# EAGLE board ds-8_clone_v2.0 (EAGLE 5.10)
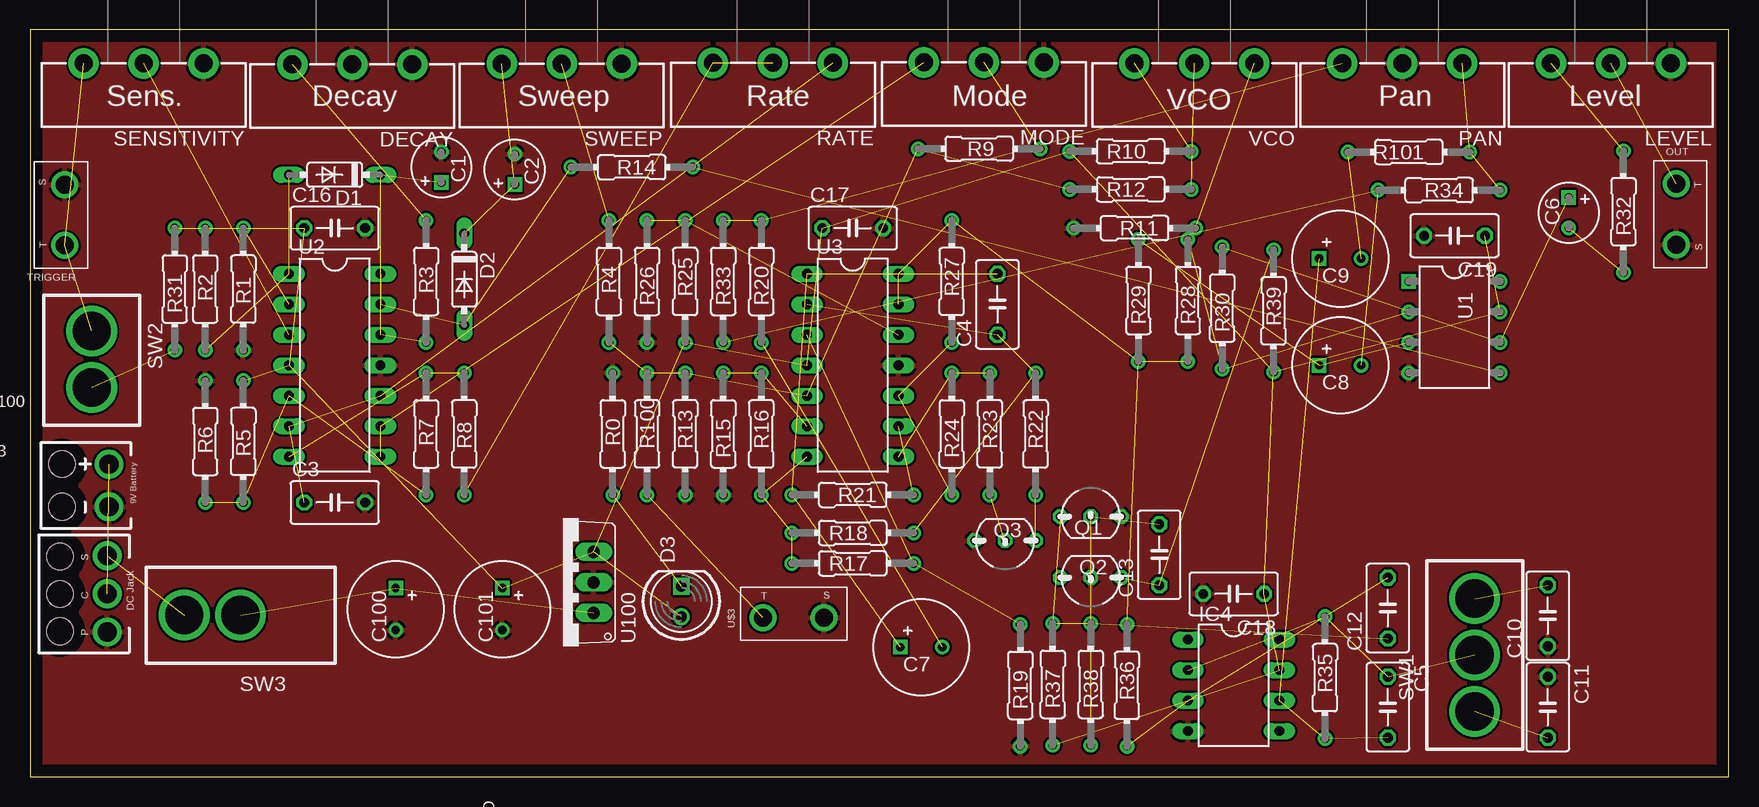
[diagram p0: board, top side]
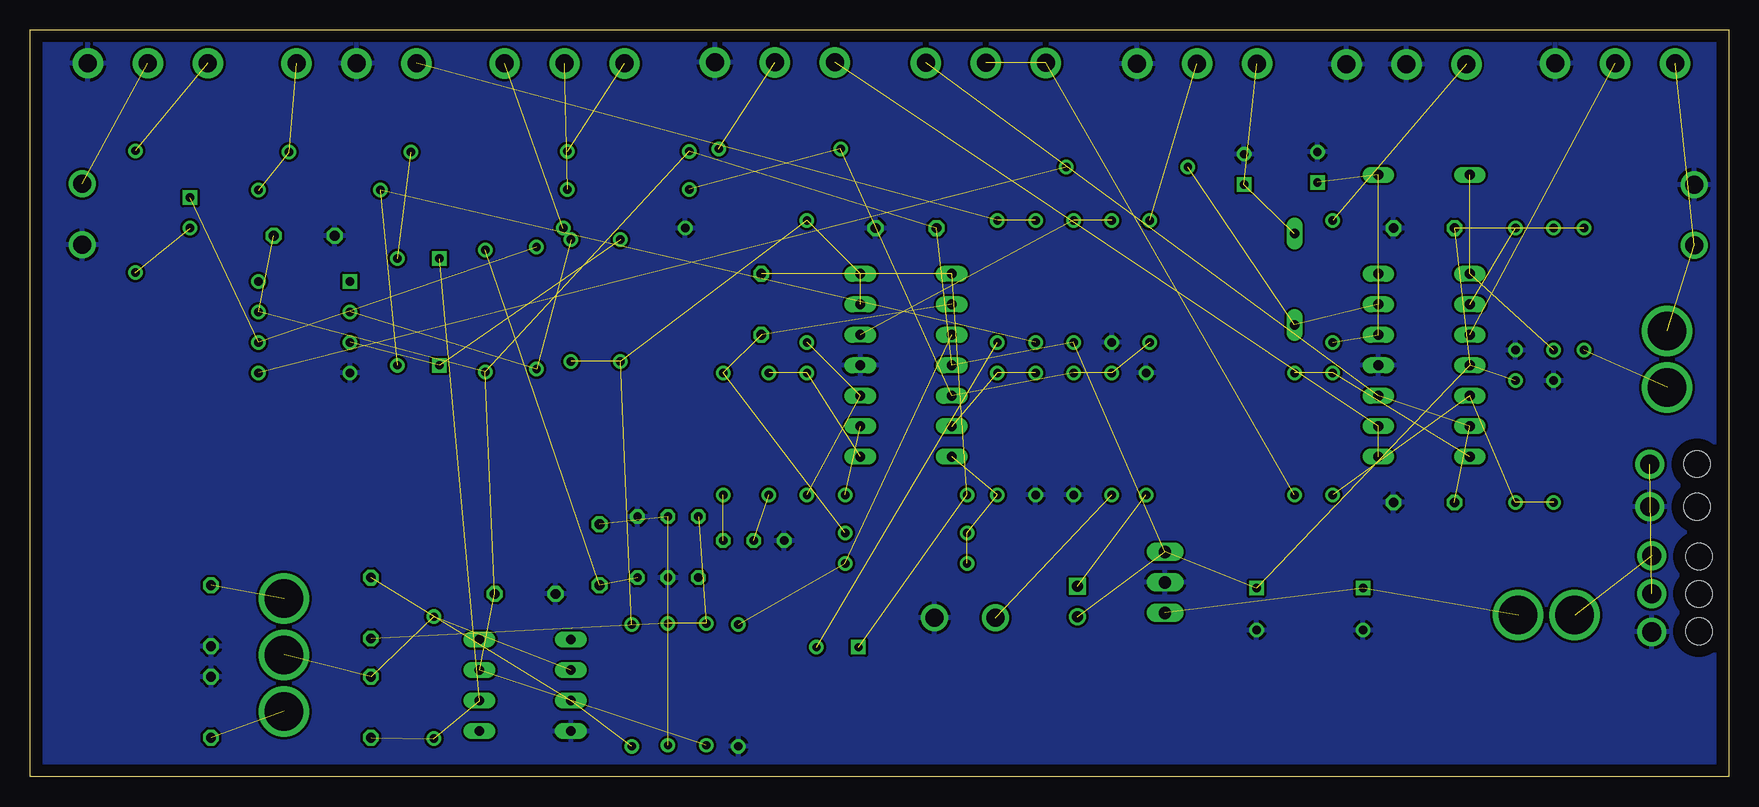
[diagram p1: board, bottom side, seen from below]

Size 141.6 x 62.23 mm. Coordinates in mm from the lower left corner, seen from the top.
Outline: 0,0 141.6,0 141.6,62.23 0,62.23 0,0
Copper layers (1*16): Top 0.035mm / dielectric 1.5mm / Bottom 0.035mm
Design rules "default": minimum track width 10mil, minimum drill 24mil, track to track 8mil, track to pad 8mil, pad to pad 8mil, via to via 8mil, smd to smd 8mil, copper to edge 40mil, drill to drill 8mil, minimum pad ring 10mil, minimum via ring 8mil, stop-mask expansion 4mil, vias tented up to drill 0mil, thermal gap 10mil

## Footprints (pad centres in the part's own frame; a part is rotated, then mirrored left to right if it is on the bottom)
050_020_1 = drill 0.7 square: + -1.27,0 | drill 0.7 round: - 1.27,0
C050-035X075 = drill 0.813 octagon: 1 -2.54,0; 2 2.54,0
080_035 = drill 0.7 square: + -1.75,0 | drill 0.7 round: - 1.75,0
DO35-7 = drill 0.813 long: A 3.81,0; C -3.81,0
LED5MM = drill 0.9 round: A -1.27,0 | drill 0.9 square: K 1.27,0
POT_ALPHA_RV16AF-20 = drill 1.5 pad 2.54 round: 1 -5,0; 2 0,0; 3 5,0
DIL08 = drill 0.813 long: 1 -3.81,-3.81; 2 -1.27,-3.81; 3 1.27,-3.81; 4 3.81,-3.81; 5 3.81,3.81; 6 1.27,3.81; 7 -1.27,3.81; 8 -3.81,3.81
MONO_JACK = drill 1.5 round: SLEEVE 2.54,0; TIP -2.54,0
TO92- = drill 0.7 octagon: 1 2.54,0; 2 0,0; 3 -2.54,0
RESISTOR = drill 0.7 round: 1 -5.08,0; 2 5.08,0
SPDT_TOGGLE_SWITCH = drill 3.2 round: A -4.7,0; B 4.7,0; C 0,0
MOMENTARY_SW = drill 3.2 round: A -2.223,0.064; B 2.478,0.064
SPST_TOGGLE_SWITCH = drill 3.2 round: A 0,0; B 4.7,0
DIL08' = drill 0.7 square: 1 -3.81,-3.81 | drill 0.7 round: 2 -1.27,-3.81; 3 1.27,-3.81; 4 3.81,-3.81; 5 3.81,3.81; 6 1.27,3.81; 7 -1.27,3.81; 8 -3.81,3.81
DIL14 = drill 0.813 long: 1 -7.62,-3.81; 2 -5.08,-3.81; 3 -2.54,-3.81; 4 0,-3.81; 5 2.54,-3.81; 6 5.08,-3.81; 7 7.62,-3.81; 8 7.62,3.81; 9 5.08,3.81; 10 2.54,3.81; 11 0,3.81; 12 -2.54,3.81; 13 -5.08,3.81; 14 -7.62,3.81
TO220V = drill 1.016 long: 1 -2.54,-2.54; 2 0,-2.54; 3 2.54,-2.54
9V_BATTERY = drill 1.6 round: 9V_BATTERY_+ -1.778,1.27; 9V_BATTERY_- 1.778,1.27 | hole 2.2: -1.778,-2.667; 1.778,-2.667
DC_JACK_OFFBOARD = drill 1.6 round: CONNECT 0,1.27; PIN 3.175,1.27; SLEEVE -3.175,1.27 | hole 2.2: -3.111,-2.667; 0,-2.667; 3.111,-2.667

## Placement (x,y rotation side)
C1  3.3uF  [050_020_1]  34.29,50.8 90 top
C2  3.3uF  [050_020_1]  40.41,50.61 90 top
C3  47nF  [C050-035X075]  25.4,22.86 0 top
C4  1nF  [C050-035X075]  80.64,39.37 90 top
C5  22pF  [C050-035X075]  113.19,5.8 270 top
C6  1uF  [050_020_1]  128.27,46.99 270 top
C7  1uF  [080_035]  74.3,10.79 0 top
C8  1uF  [080_035]  109.22,34.29 0 top
C9  47nF  [080_035]  109.22,43.18 0 top
C10  10nF  [C050-035X075]  126.52,13.42 90 top
C11  4.7nF  [C050-035X075]  126.52,5.8 270 top
C12  10nF  [C050-035X075]  113.19,14.06 90 top
C13  1nF  [C050-035X075]  94.14,18.5 90 top
C16  0.1uF  [C050-035X075]  25.4,45.72 0 top
C17  0.1uF  [C050-035X075]  68.58,45.72 0 top
C18  0.1uF  [C050-035X075]  100.33,15.24 180 top
C19  0.1uF  [C050-035X075]  118.75,45.09 180 top
C100  100uF  [080_035]  30.48,13.97 270 top
C101  10uF  [080_035]  39.37,13.97 270 top
D1  1N4148DO35-7  [DO35-7]  25.4,50.16 180 top
D2  1N4148DO35-7  [DO35-7]  36.2,41.46 270 top
D3  LED5MM  [LED5MM]  54.29,14.61 90 top
DECAY  1M  [POT_ALPHA_RV16AF-20]  26.87,59.37 180 top
IC4  UA741P  [DIL08]  100.33,7.62 270 top
LEVEL  50kA  [POT_ALPHA_RV16AF-20]  131.78,59.46 180 top
MODE  50kA  [POT_ALPHA_RV16AF-20]  79.51,59.54 180 top
OUT  MONO_JACK  [MONO_JACK]  137.25,46.88 270 top
PAN  50kB  [POT_ALPHA_RV16AF-20]  114.39,59.45 180 top
Q1  BC550  [TO92-]  88.42,21.68 0 top
Q2  BC550  [TO92-]  88.42,16.6 180 top
Q3  BC550  [TO92-]  81.28,19.68 180 top
R0  1k  [RESISTOR]  48.58,28.57 270 top
R1  10k  [RESISTOR]  17.78,40.64 90 top
R2  1M  [RESISTOR]  14.61,40.64 270 top
R3  22k  [RESISTOR]  33.02,41.27 270 top
R4  39k  [RESISTOR]  48.26,41.27 270 top
R5  100k  [RESISTOR]  17.78,27.94 90 top
R6  100k  [RESISTOR]  14.61,27.94 270 top
R7  10k  [RESISTOR]  33.02,28.57 270 top
R8  3.3k  [RESISTOR]  36.2,28.57 90 top
R9  68k  [RESISTOR]  79.12,52.33 180 top
R10  22  [RESISTOR]  91.73,52.12 180 top
R11  220  [RESISTOR]  92.08,45.72 0 top
R12  39k  [RESISTOR]  91.73,48.95 180 top
R13  100k  [RESISTOR]  54.61,28.57 90 top
R14  4.7k  [RESISTOR]  50.16,50.8 0 top
R15  100k  [RESISTOR]  57.78,28.57 270 top
R16  100k  [RESISTOR]  60.96,28.57 90 top
R17  47k  [RESISTOR]  68.58,17.78 180 top
R18  100k  [RESISTOR]  68.58,20.32 180 top
R19  47k  [RESISTOR]  82.55,7.62 270 top
R20  10k  [RESISTOR]  60.96,41.27 270 top
R21  47k  [RESISTOR]  68.58,23.5 0 top
R22  47k  [RESISTOR]  83.82,28.57 90 top
R23  47k  [RESISTOR]  80.01,28.57 90 top
R24  47k  [RESISTOR]  76.83,28.57 270 top
R25  10k  [RESISTOR]  54.61,41.27 90 top
R26  10k  [RESISTOR]  51.44,41.27 270 top
R27  47k  [RESISTOR]  76.83,41.27 90 top
R28  220  [RESISTOR]  96.52,39.69 270 top
R29  220  [RESISTOR]  92.39,39.69 270 top
R30  100k  [RESISTOR]  99.38,39.05 270 top
R31  10k  [RESISTOR]  12.06,40.64 270 top
R32  10k  [RESISTOR]  132.82,47.09 270 top
R33  100k  [RESISTOR]  57.78,41.27 270 top
R34  33k  [RESISTOR]  117.47,48.88 0 top
R35  470k  [RESISTOR]  107.95,8.26 90 top
R36  100k  [RESISTOR]  91.44,7.62 90 top
R37  15k  [RESISTOR]  85.25,7.71 270 top
R38  1M  [RESISTOR]  88.42,7.71 270 top
R39  330  [RESISTOR]  103.66,38.82 90 top
R100  68k  [RESISTOR]  51.44,28.57 90 top
R101  10k  [RESISTOR]  114.93,52.06 180 top
RATE  2M2  [POT_ALPHA_RV16AF-20]  61.94,59.48 180 top
SENSITIVITY  50kA  [POT_ALPHA_RV16AF-20]  9.48,59.45 180 top
SW1  SPDT_SWITCH  [SPDT_TOGGLE_SWITCH]  120.43,10.15 90 top
SW2  MOMENTARY_SW  [MOMENTARY_SW]  5.08,34.92 270 top
SW3  SPST_SWITCH  [SPST_TOGGLE_SWITCH]  17.55,13.47 180 top
SWEEP  50kA  [POT_ALPHA_RV16AF-20]  44.32,59.43 180 top
TRIGGER  MONO_JACK  [MONO_JACK]  2.9,46.81 90 top
U1  LM3080N  [DIL08']  118.75,37.47 270 top
U2  LM324N  [DIL14]  25.4,34.29 270 top
U3  LM324N  [DIL14]  68.58,34.29 270 top
U100  7805TV  [TO220V]  44.45,16.19 90 top
U$1  9V_BATTERY_CLIP  [9V_BATTERY]  5.32,24.28 270 top
U$2  DC_JACK_OFFBOARD  [DC_JACK_OFFBOARD]  5.16,15.24 270 top
U$3  MONO_JACK  [MONO_JACK]  63.66,13.27 0 top
VCO  50kA  [POT_ALPHA_RV16AF-20]  97.04,59.45 180 top

## Library data of the parts
C1 C2 C6-C9 C100 C101 = gm-caps-electro-pol
C3-C5 C10-C13 C16-C19 = resistor
D1 D2 = diode
D3 = gm-diodes
DECAY LEVEL MODE PAN RATE SENSITIVITY SWEEP VCO = SparkFun
IC4 U2 U3 U100 = linear
OUT R0 R1-R39 R100 R101 SW1-SW3 TRIGGER U$1-U$3 = 00_steve
Q1-Q3 = gm-trans
U1 = gm-ics

## Nets
+9V: C16.1 C17.1 C18.1 C19.1 C101.+ D3.A IC4.7 R5.2 R10.2 R25.1 R31.1 R37.2 R39.1 U1.7 U2.4 U3.4 U100.3
C5: C5.1 IC4.2 R35.2 SW1.C
GND: C1.- C2.- C3.2 C10.1 C11.1 C16.2 C17.2 C18.2 C19.2 C100.- C101.- DECAY.1 DECAY.2 IC4.4 LEVEL.1 MODE.1 OUT.SLEEVE PAN.2 Q1.1 Q2.2 Q3.1 R0.1 R1.1 R6.1 R11.1 R13.1 R15.2 R19.2 R26.2 SENSITIVITY.1 SWEEP.1 TRIGGER.SLEEVE U1.4 U2.11 U3.11 U100.2 U$1.9V_BATTERY_- U$2.PIN U$3.SLEEVE
N$1: SENSITIVITY.3 SW2.A TRIGGER.TIP
N$2: SW3.B U$2.SLEEVE
N$3: SENSITIVITY.2 U2.3
N$4: U$1.9V_BATTERY_+ U$2.CONNECT
N$5: R1.2 R2.1 U2.2
N$6: D1.A R2.2 U2.1
N$7: C1.+ D1.C R3.2 U2.12
N$8: R31.2 SW2.B
N$9: DECAY.3 R3.1
N$10: D2.A R14.1 U2.13 U2.14
N$11: R14.2 U1.5
N$12: R4.1 SWEEP.2
N$13: R25.2 R26.1 U3.12
N$14: R28.1 R30.2 U1.2
N$15: C8.+ R29.1 U1.3
N$16: R27.2 R28.2 R29.2 R36.2 U3.13 U3.14
N$17: R100.1 U$3.TIP
N$18: C6.+ R30.1 U1.6
N$19: R4.2 R9.2 R12.2 R13.2 R100.2 U3.5
N$20: MODE.2 R9.1
N$21: R11.2 VCO.1
N$22: R12.1 VCO.2
N$23: C2.+ D2.C SWEEP.3
N$24: R5.1 R6.2 R7.2 U2.5
N$25: LEVEL.3 R32.1
N$26: R7.1 R8.2 U2.7
N$27: LEVEL.2 OUT.TIP
N$28: R10.1 VCO.3
N$29: R15.1 R16.2 U3.6
N$30: R16.1 R17.2 R18.2 U3.7
N$31: R17.1 R19.1 U3.3
N$32: C4.1 R18.1 R22.2 U3.2
N$33: C4.2 C7.+ R21.1 U3.1
N$34: C7.- R20.2
N$35: PAN.3 R20.1 R33.1
N$36: C8.- R33.2 R34.1
N$37: MODE.3 U2.8 U2.9
N$38: C9.- R101.2
N$39: C5.2 C9.+ IC4.6 R35.1
N$40: D3.K R0.2
N$41: C10.2 SW1.B
N$42: C12.2 IC4.3 R36.1
N$43: C11.2 SW1.A
N$44: C12.1 Q1.3 R37.1 R38.1
N$45: C100.+ SW3.A U100.1
N$46: C13.2 Q1.2 R38.2
N$47: C13.1 Q2.3 R39.2
N$48: Q3.3 R22.1
N$49: R21.2 U3.9
N$50: Q3.2 R23.1
N$51: R23.2 R24.1 U3.8
N$52: R24.2 R27.1 U3.10
N$53: C6.- R32.2
N$55: R8.1 RATE.2 RATE.3
N$56: C3.1 RATE.1 U2.6 U2.10
R34: PAN.1 R34.2 R101.1

## Tracks (layer width: path | path; a pad name or v marks a point on that pad's centre or on a via)
+9V  (16 unrouted)
C5  (3 unrouted)
GND
  pour Bottom: 0,62.23 141.6,62.23 141.6,0 0,0
  pour Top: 0,62.23 141.6,62.23 141.6,0 0,0
N$1  (2 unrouted)
N$2  (1 unrouted)
N$3  (1 unrouted)
N$4  (1 unrouted)
N$5  (2 unrouted)
N$6  (2 unrouted)
N$7  (3 unrouted)
N$8  (1 unrouted)
N$9  (1 unrouted)
N$10  (3 unrouted)
N$11  (1 unrouted)
N$12  (1 unrouted)
N$13  (2 unrouted)
N$14  (2 unrouted)
N$15  (2 unrouted)
N$16  (5 unrouted)
N$17  (1 unrouted)
N$18  (2 unrouted)
N$19  (5 unrouted)
N$20  (1 unrouted)
N$21  (1 unrouted)
N$22  (1 unrouted)
N$23  (2 unrouted)
N$24  (3 unrouted)
N$25  (1 unrouted)
N$26  (2 unrouted)
N$27  (1 unrouted)
N$28  (1 unrouted)
N$29  (2 unrouted)
N$30  (3 unrouted)
N$31  (2 unrouted)
N$32  (3 unrouted)
N$33  (3 unrouted)
N$34  (1 unrouted)
N$35  (2 unrouted)
N$36  (2 unrouted)
N$37  (2 unrouted)
N$38  (1 unrouted)
N$39  (3 unrouted)
N$40  (1 unrouted)
N$41  (1 unrouted)
N$42  (2 unrouted)
N$43  (1 unrouted)
N$44  (3 unrouted)
N$45  (2 unrouted)
N$46  (2 unrouted)
N$47  (2 unrouted)
N$48  (1 unrouted)
N$49  (1 unrouted)
N$50  (1 unrouted)
N$51  (2 unrouted)
N$52  (2 unrouted)
N$53  (1 unrouted)
N$55  (2 unrouted)
N$56  (3 unrouted)
R34  (2 unrouted)

## Text on the board
tPlace: Q2 | C3 | Sens. | Decay | Sweep | Rate | Mode | VCO | Pan | Level | Q1 | C9 | C8 | U2 | U100 | U3 | C4 | U1 | U4 | LED | Q3 | R35 | + | C6